# Altium PCB PCB1.PcbDoc
Units mm, origin at the board's own origin, x right, y up, seen from the top; angles counter-clockwise.
Board outline 142.49 x 102.87 mm, 2 copper layers (Top Layer, Bottom Layer); 60 components, 32 nets, 143 pads, 2 vias.
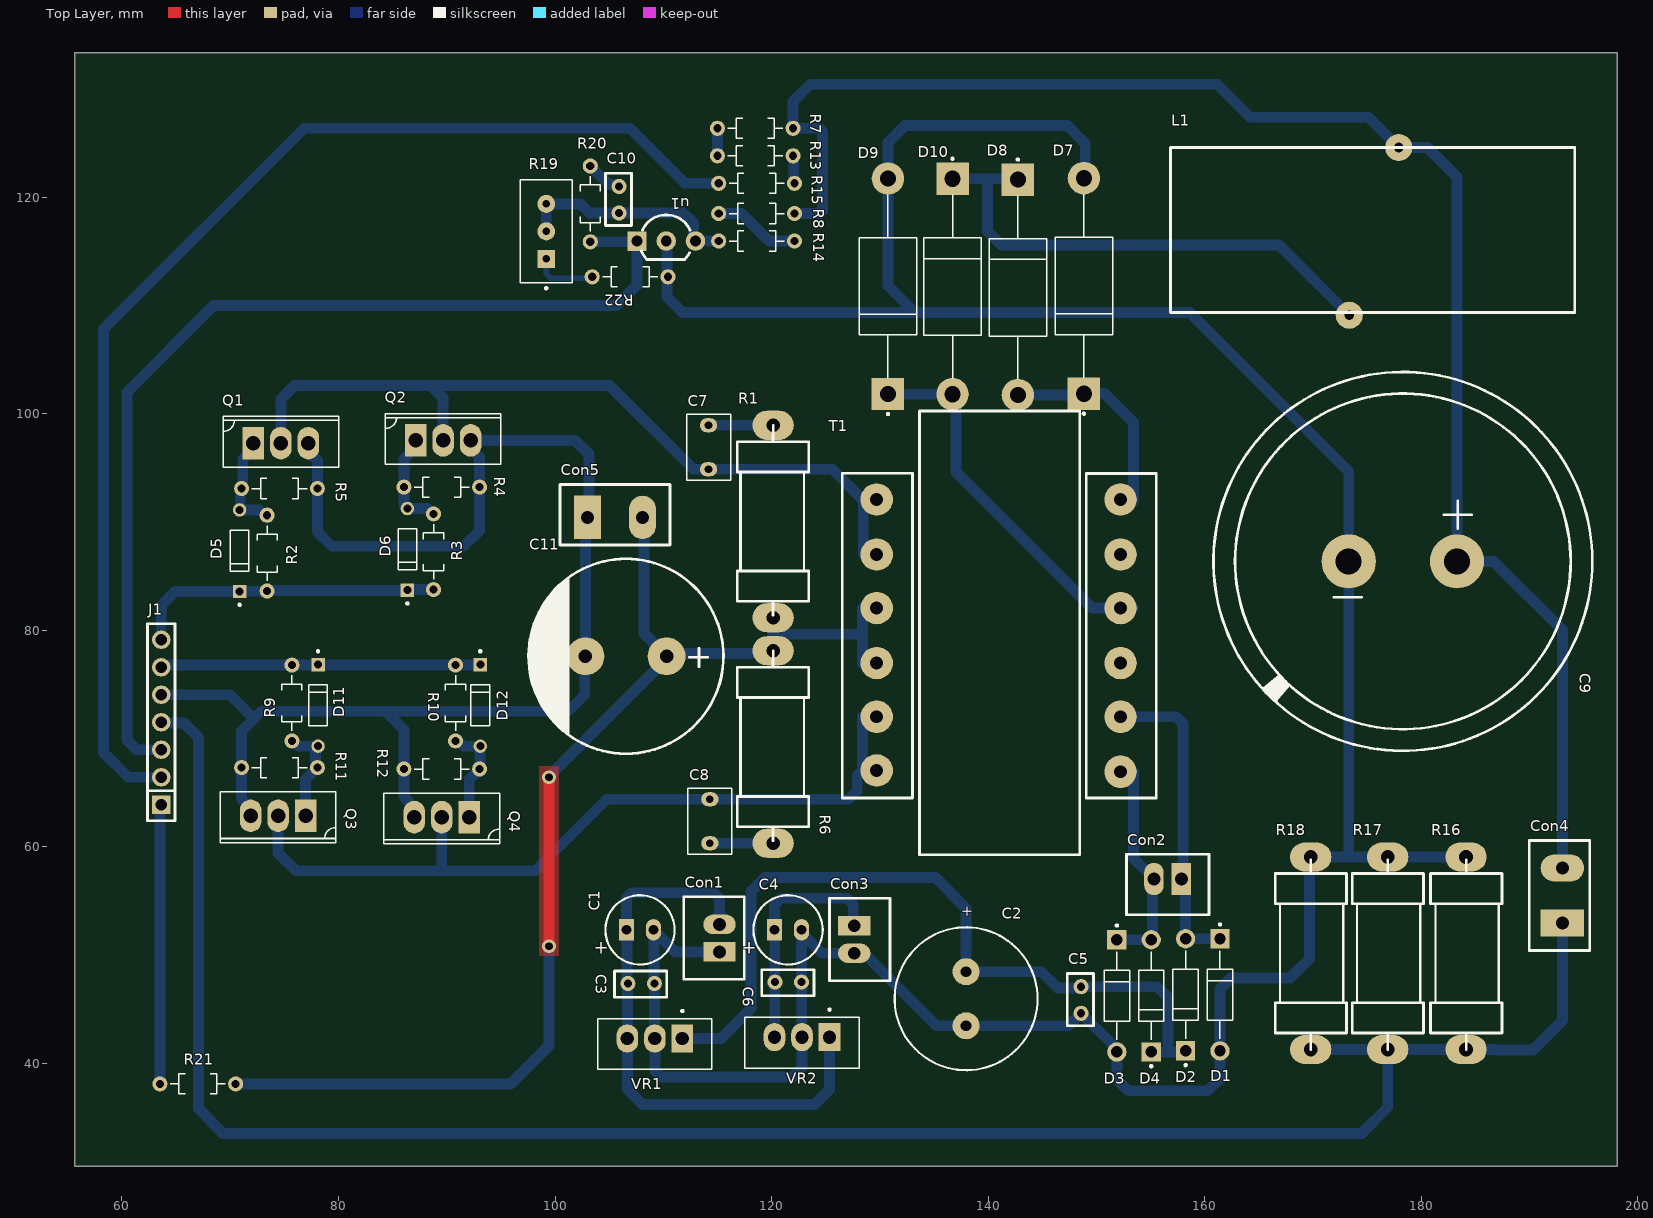
[diagram p0: Top Layer view]
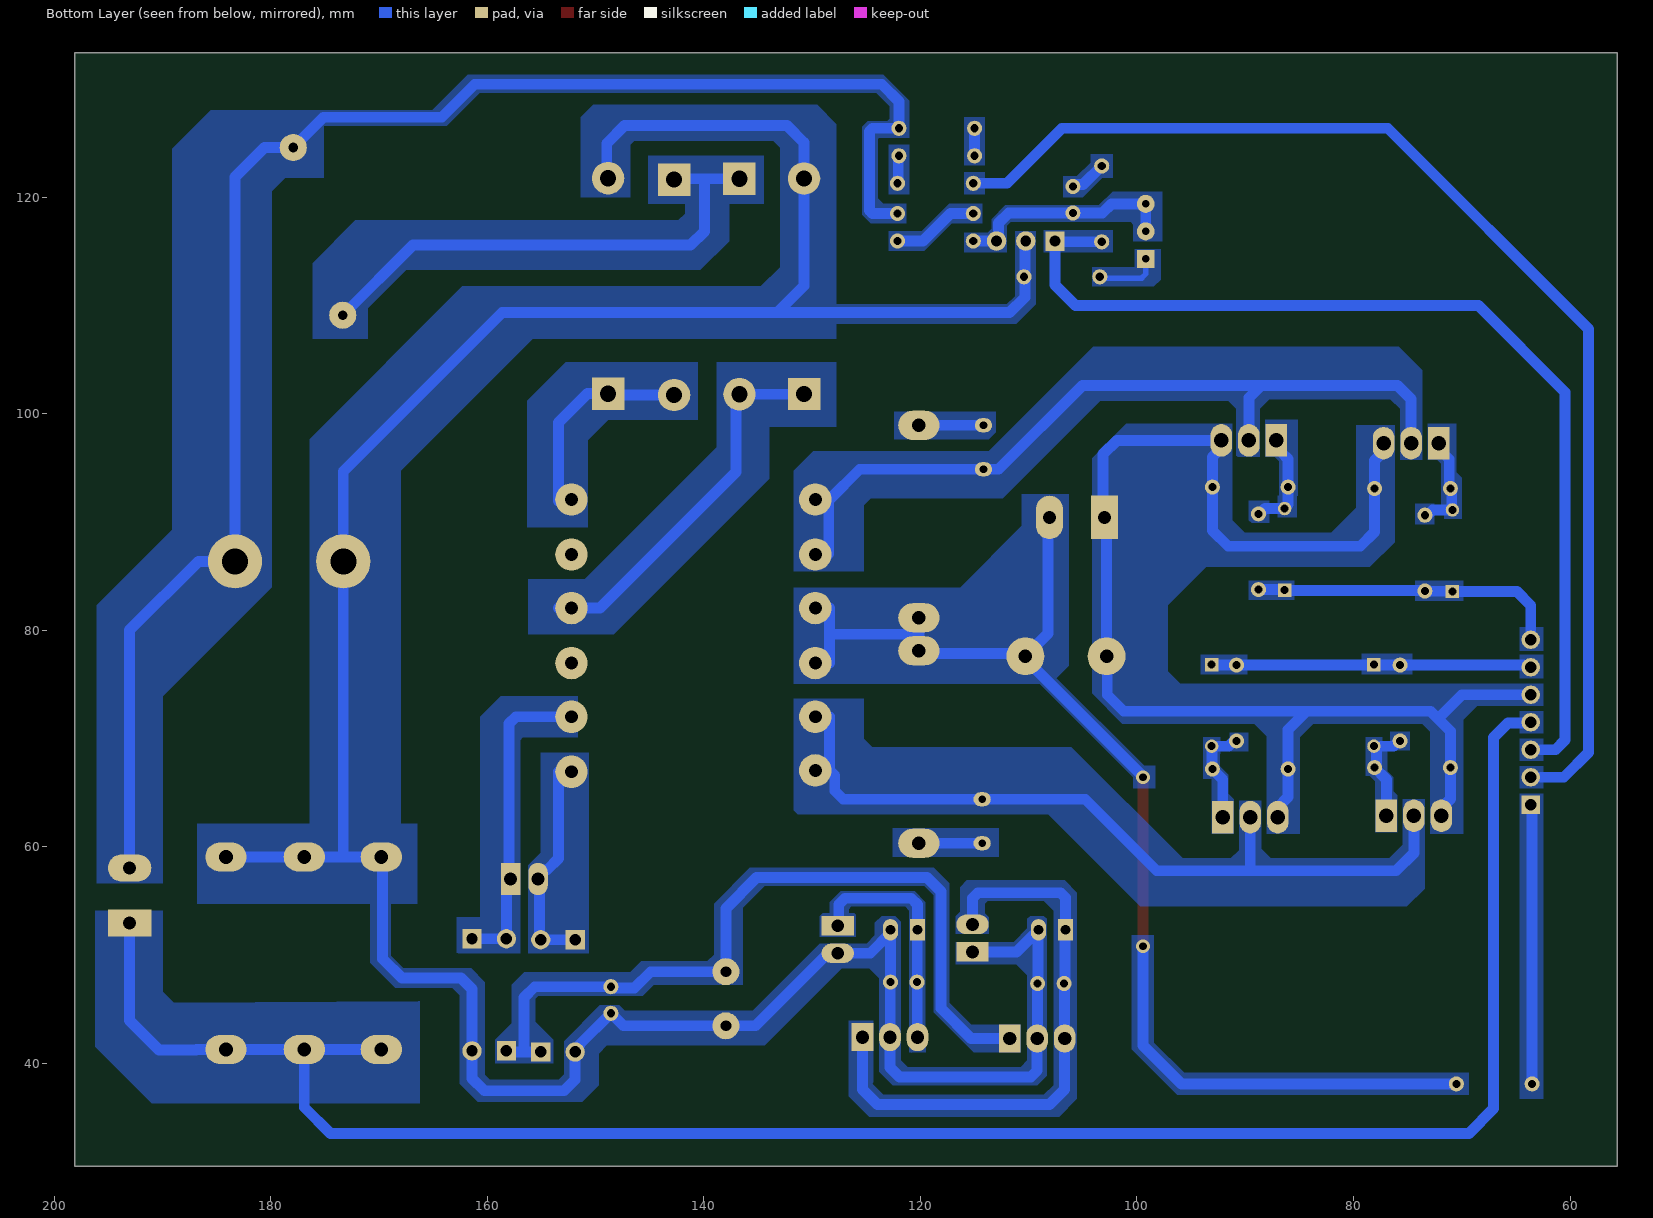
[diagram p1: Bottom Layer view, seen from below]
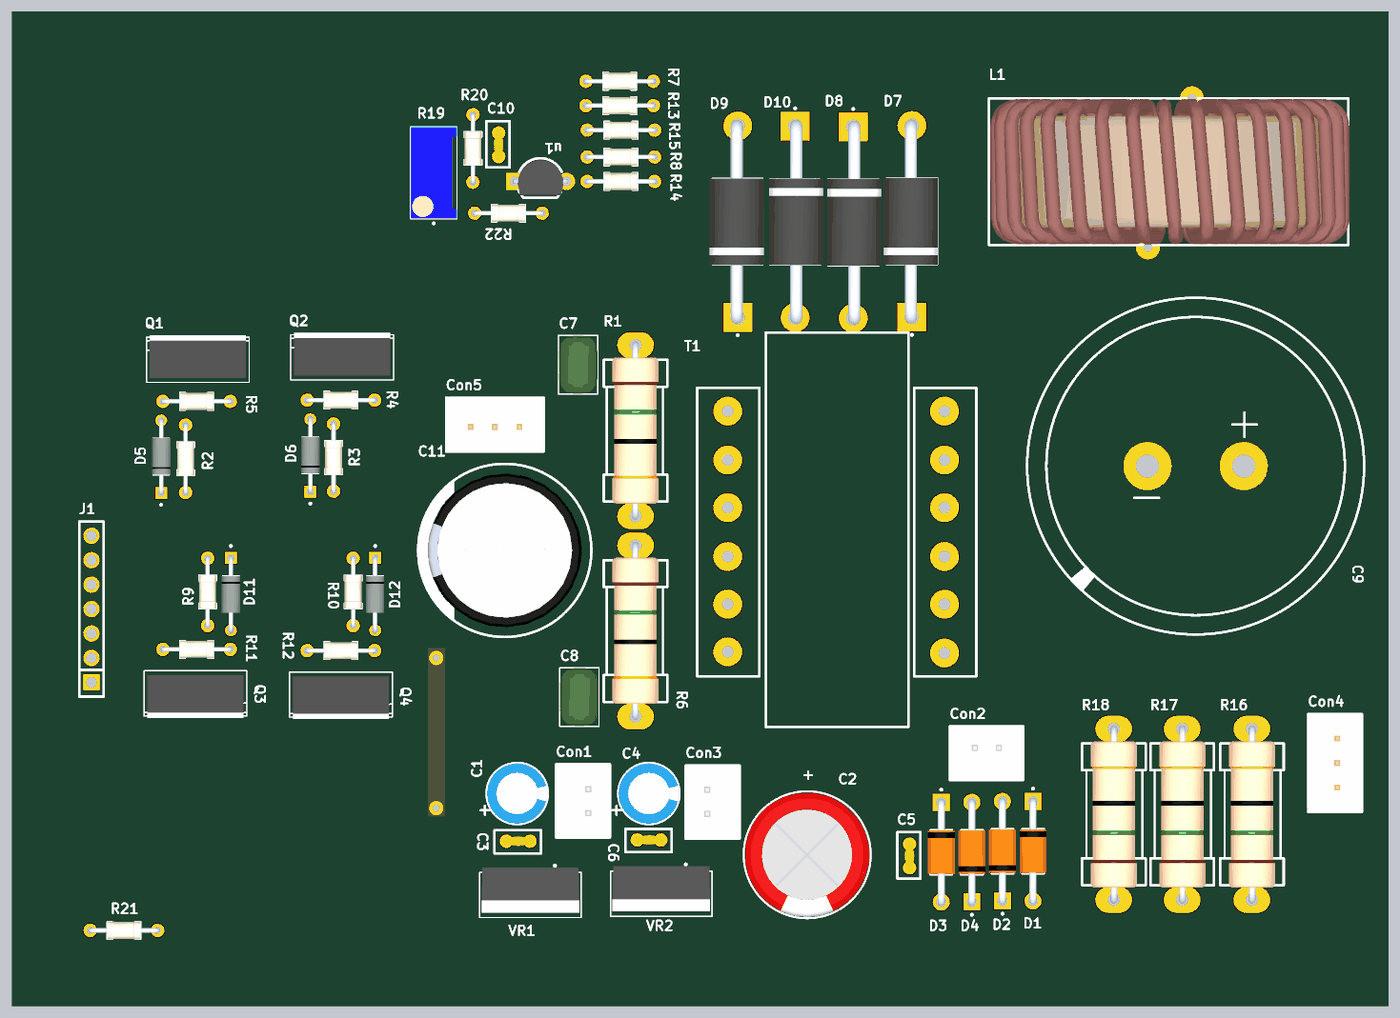
[diagram p2: 3D render of the assembled board from above, using the file's embedded part models]

## Layer stack, top to bottom
Top Solder: solder mask 0.0102, Solder Resist, Dk 3.5
Top Layer: signal copper 0.0356
Dielectric 1: dielectric 0.32, FR-4, Dk 4.8
Bottom Layer: signal copper 0.0356
Bottom Solder: solder mask 0.0102, Solder Resist, Dk 3.5

## Board outline
55.626,30.48 55.626,133.35 198.12,133.35 198.12,30.48

## Design rules (kind name [scope] priority, off if disabled: settings)
Clearance [All] p1: gap=0.254 ignorepadtopadclearanceinfootprint=FALSE except(0: Arc-Hole Track-Hole SMDPad-Hole THPad-Hole Via-Hole Fill-Hole Poly-Hole Region-Hole Text-Hole)
Height [All] p1: minheight=0 maxheight=50.4 prefheight=12.7
PolygonConnect [All] p1: connectstyle=Direct reliefconductorwidth=0.254 reliefentries=4 polygonreliefangle="90 Angle" airgapwidth=0.254
RoutingVias [All] p1: holewidth=0.711 width=1.27 viastyle="Through Hole" minholewidth=0.711 minwidth=1.27 maxholewidth=0.711 maxwidth=1.27
SolderMaskExpansion [All] p1: expansion=0.102 istentingtop=FALSE
Width [All] p1: maxlimit=1 minlimit=0.254 preferedwidth=0.5 minimp=50.000000 maximp=50.000000 favimp=50.000000
29 further rules are at their usual default settings.

## Classes and differential pairs
component class Sheet2: C7 C8 C9 C10 C11 Con4 Con5 D5 D6 D7 D8 D9 D10 D11 D12 J1 L1 Q1 Q2 Q3 Q4 R1 R2 R3 R4 R5 R6 R7 R8 R9 R10 R11 R12 R13 R14 R15 R16 R17 R18 R19 R20 R21 R22 T1 u1
component class Sheet1: C1 C2 C3 C4 C5 C6 Con1 Con2 Con3 D1 D2 D3 D4 VR1 VR2

## Components (designator, comment, footprint, x,y, rotation, side; value= is the part's Value field where it differs from the comment)
C1 "100UF25V" "CAP LS-2.5MM D6.3 H7 - DUPLICATE" 106.593,52.324 r0 top
C2 "470UF25V" CAP_RADIAL_D13.0_P5.0_H20.0 137.922,45.974 r90 top
C3 "1UFCER" CAP-CER-2.54 107.95,47.371 r180 top
C4 "100UF25V" "CAP LS-2.5MM D6.3 H7 - DUPLICATE" 120.269,52.324 r0 top
C5 "100nFCER" CAP-CER-2.54 148.59,45.847 r90 top
C6 "1UFCER" CAP-CER-2.54 121.539,47.498 r180 top
C7 "0.1uF" CAP-P_PILM 114.173,96.901 r270 top
C8 "0.1uF" CAP-P_PILM 114.3,62.357 r270 top
C9 "1000UF400V" CAP-TH_BD35.0-P10.00-D2.3-FD 178.308,86.36 r180 top
C10 "100nFCER" CAP-CER-2.54 105.918,119.761 r90 top
C11 "4700UF 35V" CAP-TH_BD18.0-P7.50-D1.2-FD 106.553,77.597 r180 top
Con1 "2pos" 2POS 115.189,50.292 r90 top
Con2 "2pos" 2POS 157.861,57.023 r180 top
Con3 "2pos" 2POS 127.635,52.705 r270 top
Con4 "2pos-3" "2POS - 3" 193.04,55.499 r90 top
Con5 "2pos" "2POS - 3" 105.537,90.424 r0 top
D1 "FR107" DIOAD1036W78L470D235 161.417,46.328 r270 top
D2 "FR107" DIOAD1036W78L470D235 158.242,46.328 r90 top
D3 "FR107" DIOAD1036W78L470D235 151.892,46.228 r270 top
D4 "FR107" DIOAD1036W78L470D235 155.067,46.228 r90 top
D5 "1N4148" DO-35 70.866,87.249 r90 top
D6 "1N4148" DO-35 86.36,87.376 r90 top
D7 "FR307" DO-27_BD5.3-L8.4-P12.40-D1.3-RD 148.903,111.413 r90 top
D8 "FR307" DO-27_BD5.3-L8.4-P12.40-D1.3-RD 142.689,112.068 r270 top
D9 "FR307" DO-27_BD5.3-L8.4-P12.40-D1.3-RD 130.81,111.379 r90 top
D10 "FR307" DO-27_BD5.3-L8.4-P12.40-D1.3-RD 136.652,112.141 r270 top
D11 "1N4148" DO-35 78.105,73.152 r270 top
D12 "1N4148" DO-35 93.091,73.152 r270 top
J1 "HDR7Pin" "HDR-TH 7P - DUPLICATE" 63.599,71.477 r90 top
L1 "Troidal core  220uH" "TOROIDAL CORE INDUCTOR" 175.641,116.967 r0 top
Q1 "IRF3205" TO-220 74.676,97.282 r0 top
Q2 "IRF3205" TO-220 89.662,97.536 r0 top
Q3 "IRF3205" TO-220 74.422,62.865 r180 top
Q4 "IRF3205" TO-220 89.535,62.738 r180 top
R1 "RES-0.5W-27R" "RES_TH 3W" 120.142,91.059 r90 top
R2 "10R" RES-TH-7MM 73.406,87.122 r90 top
R3 "10R" RES-TH-7MM 88.773,87.249 r90 top
R4 "10K" RES-TH-7MM 89.535,93.218 r0 top
R5 "10K" RES-TH-7MM 74.549,93.091 r0 top
R6 "RES-0.5W-27R" "RES_TH 3W" 120.142,70.231 r90 top
R7 "150K" RES-TH-7MM 118.491,126.365 r0 top
R8 "1M" RES-TH-7MM 118.618,118.491 r0 top
R9 "10R" RES-TH-7MM 75.692,73.279 r270 top
R10 "10R" RES-TH-7MM 90.805,73.279 r270 top
R11 "10K" RES-TH-7MM 74.549,67.31 r180 top
R12 "10K" RES-TH-7MM 89.535,67.183 r180 top
R13 "150K" RES-TH-7MM 118.491,123.825 r180 top
R14 "0.5M" RES-TH-7MM 118.618,115.951 r0 top
R15 "40K" RES-TH-7MM 118.618,121.285 r0 top
R16 "RES-2W-1R" "RES_TH 3W" 184.15,49.149 r270 top
R17 "RES-2W-1R" "RES_TH 3W" 176.911,49.149 r270 top
R18 "RES-2W-1R" "RES_TH 3W" 169.799,49.149 r270 top
R19 "10K" TRIM_3296W-1-250 99.187,116.84 r90 top
R20 "4.7K" RES-TH-7MM 103.251,119.38 r90 top
R21 "0R" RES-TH-7MM 67,38.1 r0 top
R22 "4.7K" RES-TH-7MM 106.934,112.649 r180 top
T1 "current transformer" EE35-FP16 140.97,79.502 r0 top
u1 "TL431" TO-92 110.352,115.902 r0 top
VR1 "LM7812CT" TO254P1054X470X1955-3 109.22,42.291 r180 top
VR2 "LM7805CT" TO254P1054X470X1955-3 122.809,42.418 r180 top

## Footprints (in the part's own frame and the unit in brackets; to place one, negate y for a bottom-side part, rotate by r counter-clockwise, add the part's x,y. Pads: shape width x height; smd on the part's side, far side on the other; paste and mask are expansions set on the pad)
2POS [mm]
  rect 1.8x3 hole 1.2: 1(0,0)
  oval 1.8x3 hole 1.2: 2(2.54,0)
  silkscreen extent -2.54,-2.29 5.08,3.3, body extent -2.47,-2.32 4.96,3.41, height 6.69
"2POS - 3" [mm]
  rect 2.5x4 hole 1.2: 1(-2.54,0)
  oval 2.5x4 hole 1.2: 2(2.54,0)
  silkscreen extent -5.08,-2.54 5.08,3.05, body extent -5.04,-2.54 5.04,3.16, height 7.01
"CAP LS-2.5MM D6.3 H7 - DUPLICATE" [mm]
  rect 1.4x2 hole 0.9: 1(0,0)
  oval 1.4x2 hole 0.9: 2(2.5,0)
  silkscreen extent -1.95,-3.2 4.45,3.2, body extent -1.89,-3.14 4.39,3.14, height 7
CAP-CER-2.54 [mm]
  round 1.397 hole 0.75: 1(-1.225,0) 2(1.225,0)
  silkscreen extent -2.37,-1.14 2.46,1.27, body extent -1.62,-0.5 1.62,0.5, height 4.99
CAP-P_PILM [mm]
  oval 1.3x1.6 hole 0.71: 1(-2.032,0) 2(2.032,0)
  silkscreen extent -3.05,-2.03 3.05,2.03, body extent -3,-2 3,2, height 12.5
CAP-TH_BD18.0-P7.50-D1.2-FD [mm]
  round 3.5 hole 1.25 paste+0 mask+0.051: 1(-3.75,0.001) 2(3.75,0.001)
  silkscreen extent -9,-9 9,9, body extent -8,-8 8,8, height 35
CAP-TH_BD35.0-P10.00-D2.3-FD [mm]
  round 5 hole 2.4 paste+0 mask+0.051: 1(-5,0) 2(5,0)
  silkscreen extent -17.5,-17.5 17.5,17.5, body extent -15,-15 15,15, height 34.94
CAP_RADIAL_D13.0_P5.0_H20.0 [mm]
  round 2.5 hole 1: 1(2.487,-0.044) 2(-2.513,-0.044)
  silkscreen extent -6.61,-6.64 6.59,6.55, body extent -6.49,-6.52 6.5,6.47, height 19.89
DIOAD1036W78L470D235 [mm]
  rect 1.778x1.778 hole 1.06: 1(-5.18,0)
  round 1.778 hole 1.06: 2(5.18,0)
  silkscreen extent -6.6,-1.17 4.07,1.17, body extent -5.55,-1.4 5.55,1.4, height 2.8
DO-27_BD5.3-L8.4-P12.40-D1.3-RD [mm]
  round 3 hole 1.5 mask+0.102: A(10.341,0.059)
  rect 3x3 hole 1.5 mask+0.102: C(-9.559,0.059)
  silkscreen extent -11.51,-2.59 8.86,2.71, body extent -10.19,-2.62 10.96,2.96, height 5.6
DO-35 [mm]
  rect 1.238x1.238 hole 0.73 mask+0.102: 1(-3.674,0.005)
  round 1.238 hole 0.73 mask+0.102: 2(3.863,0.005)
  silkscreen extent -5.01,-0.86 2,0.86, body extent -3.88,-0.96 4.12,0.95, height 1.9
EE35-FP16 [mm]
  round 3 hole 1.2 paste+0.102 mask+0.102: 1(-11.26,7.493) 1(-11.26,12.573) 2(-11.26,-2.54) 2(-11.26,2.54) 3(-11.26,-12.446) 3(-11.26,-7.493) 4(11.26,-12.573) 5(11.26,-7.493) 6(11.26,2.54) 7(11.26,12.573) ""(11.26,-2.54) ""(11.26,7.493)
  silkscreen extent -14.43,-20.25 14.57,20.75
"HDR-TH 7P - DUPLICATE" [mm]
  rect 1.7x1.7 hole 1.1 paste+0 mask+0.051: 1(-7.596,-0.028)
  round 1.7 hole 1.1 paste+0 mask+0.051: 2(-5.056,-0.028) 3(-2.516,-0.028) 4(0.024,-0.028) 5(2.564,-0.028) 6(5.104,-0.028) 7(7.644,-0.028)
  silkscreen extent -9.08,-1.3 9.12,1.24
RES-TH-7MM [mm]
  round 1.397 hole 0.75: 1(-3.5,0) 2(3.5,0)
  silkscreen extent -2.55,-0.92 2.55,0.92, body extent -3.72,-0.92 3.72,0.92, height 1.84
"RES_TH 3W" [mm] "Res_TH 3W"
  oval 2.7x3.81 hole 1.27: 1(-9.906,0) 2(7.874,0)
  silkscreen extent -9.66,-3.29 7.87,3.31, body extent -10.24,-2.36 8.25,2.42, height 5.72
TO254P1054X470X1955-3 [mm]
  rect 2x2.6 hole 1.24: 1(-2.54,0)
  oval 2x2.6 hole 1.24: 2(0,0) 3(2.54,0)
  silkscreen extent -5.27,-2.64 5.27,2.86, body extent -5.08,-2.35 5.08,2.35, height 15.49
TO-92 [mm]
  rect 1.8x1.8 hole 1 paste+0 mask+0.051: 1(-2.783,0.049)
  round 1.8 hole 1 paste+0 mask+0.051: 2(-0.083,0.049) 3(2.617,0.049)
  silkscreen extent -2.38,-1.65 2.12,2.46, body extent -2.91,-1.37 2.75,2.25, height 8.77
TO-220 [mm] "TO-220"
  rect 2x3 hole 1.32: 1(-2.54,0)
  oval 2x3 hole 1.32: 2(0,0) 3(2.54,0)
  silkscreen extent -5.34,-2.22 5.34,2.47, body extent -4.98,-1.76 4.98,2.69, height 19.68
"TOROIDAL CORE INDUCTOR" [mil]
  round 98.42 hole 36 paste+0 mask+2: 1(90,300) 2(-90,-310)
  silkscreen extent -740,-300 730,300, body extent -735,-297 735,297, height 1522
TRIM_3296W-1-250 [mil]
  rect 65x65 hole 27.95: 1(-100,0)
  round 65 hole 27.95: 2(0,0) 3(100,0)
  silkscreen extent -211,-95 188,95, body extent -188,-95 188,95, height 455

## Part data
C1 C4: "CAP TH AL: 100U 25V", LCSC Part #=C43351, Unit Price=0.0057
C2: "CAP TH AL: 470U 25V", LCSC Part #=C43351, Unit Price=0.0057
C3 C6: "CAP: CER 1UF 50V", LCSC Part #=C1848, Unit Price=0.0104
C5: "CAP: CER 100nF 16V", LCSC Part #=C1848, Unit Price=0.0104
C7 C8: library part 0.1uF_film, "Cap Ceramic 0.1uF 100V X7R 10% Radial 2.54mm 125Â°C T/R", Package=None, Check_prices=https://www.snapeda.com/parts/SR201C104KARTR1/Kyocera/view-part/?ref=eda, MF="KYOCERA AVX", MP=SR201C104KARTR1, SnapEDA_Link=https://www.snapeda.com/parts/SR201C104KARTR1/Kyocera/view-part/?ref=snap
C9: "CAP TH AL: 1000U 400V", LCSC Part #=C43351, Unit Price=0.0057
C10: "CAP: CER 100nF 50V", LCSC Part #=C1848, Unit Price=0.0104
C11: "CAP TH AL: 4700UF 35V", LCSC Part #=C43351, Unit Price=0.0057
Con1 Con2 Con3 Con4 Con5: "P2.54mm"
D1 D2 D3 D4: "DIODE: GEN 1A 1.0V@1A 1kV DO-41 TH", LCSC Part #=C36138, Unit Price=0.0313
D5 D6 D11 D12: "Rectifier Diode Small Signal Switching 100V 0.3A 4ns 2-Pin DO-35 T/R", LCSC Part #=C36138, Unit Price=0.0313
D7 D8 D9 D10: "DIODE: 500ns, 3A, 1000V, Fast Recovery RectifierDO-201AD TH", LCSC Part #=C36138, Unit Price=0.0313
J1: "HEADER: 1*7P Male"
L1: library part Inductor, "Troidal core  inductor: 220uH"
Q1 Q2 Q3 Q4: "MOSFET: N-CH 55V 110A TO-220", LCSC Part #=C274639, Unit Price=0.2595
R1 R6: "RES: 27 OHM 1% 0.5W TH"
R2 R3 R9 R10: "RES TH: 10R"
R4 R5 R11 R12: "RES TH: 10K"
R7 R13: "RES TH: 150K"
R8: "RES TH: 1M"
R14: "RES TH: 0.5M"
R15: "RES TH: 40K"
R16 R17 R18: "RES: 1 OHM 1% 2W TH"
R19: library part "10K POT", "RES TH: 10K POT"
R20 R22: "RES TH: 4.7K"
R21: "RES TH: JUMPER"
T1: library part "EE35 transformer", "ferrite core transformer EE35"
u1: "Adjustable precision shunt regulator"
VR1: "1.5-A, 12-V, linear voltage regulator", Package="TO-220-3 Texas Instruments", Check_prices=https://www.snapeda.com/parts/LM7812CT/NOPB/Texas+Instruments/view-part/?ref=eda, MF="Texas Instruments", MP=LM7812CT/NOPB, SnapEDA_Link=https://www.snapeda.com/parts/LM7812CT/NOPB/Texas+Instruments/view-part/?ref=snap
VR2: "1.5-A,  5-V, linear voltage regulator", Package="TO-220-3 Texas Instruments", Check_prices=https://www.snapeda.com/parts/LM7812CT/NOPB/Texas+Instruments/view-part/?ref=eda, MF="Texas Instruments", MP=LM7812CT/NOPB, SnapEDA_Link=https://www.snapeda.com/parts/LM7812CT/NOPB/Texas+Instruments/view-part/?ref=snap

## Via types
v1: diameter 1.27, hole 0.711, Top Layer to Bottom Layer, 2 vias

## Nets (pads, with @x,y where several pads share a name; then routed paths per layer and width w, separated by ;. In a path a pad name is that pad's centre, name@x,y a point inside that pad or via, vN(x,y) a via of type N, cw(c..) or ccw(c..) an arc to the next point about the centre after c; other vN are vias at no path point)
400V: C9.1 Con4.2 L1.1 R7.2 R8.2 | length 150.7
  Bottom Layer w1: R8.2 124.421,118.491 124.714,118.784 124.714,126.072 124.421,126.365 R7.2 121.991,128.849 123.571,130.429 161.163,130.429 164.211,127.381 175.133,127.381 L1.1 180.594,124.587 183.308,121.873 C9.1 186.69,86.36 193.04,80.01 Con4.2
+5: C4.1 C6.2 Con3.1 VR2.3 | length 22
  Bottom Layer w1: VR2.3 120.291,42.44 120.291,47.476 C6.2 120.291,47.52 120.291,52.302 C4.1 120.269,54.659 120.855,55.245 126.962,55.245 127.548,54.659 127.548,53.105 127.635,53.018 Con3.1
+12: C1.1 C3.2 Con1.2 VR1.3 VR2.1 | length 53.8
  Bottom Layer w1: Con1.2 115.189,55.245 114.681,55.753 107.061,55.753 106.593,55.285 C1.1 106.659,52.258 106.659,47.437 C3.2 106.702,47.349 106.702,42.313 VR1.3 106.68,37.592 108.077,36.195 123.952,36.195 125.349,37.592 VR2.1
+18VAC: Con2.1 D1.1 D2.2 T1.5 | length 28.1
  Bottom Layer w1: T1.5@153.416,72.009 157.353,72.009 157.988,71.374 157.988,57.15 Con2.1 158.242,56.642 D2.2 D1.1
-18VAC: Con2.2 D3.1 D4.2 T1.4 | length 19.7
  Bottom Layer w1: D3.1 D4.2 155.194,51.535 155.194,56.896 Con2.2 155.321,57.271 154.72,57.872 154.472,57.872 153.416,58.928 T1.4@153.416,66.929
D1: C7.2 Q1.2 Q2.2 T1.1 | length 73.4
  Bottom Layer w1: Q1.2 74.676,101.346 75.946,102.616 88.519,102.616 ; Q2.2 89.662,101.473 88.519,102.616 ; T1.1@128.524,86.995 128.46,87.058 128.46,92.011 128.397,92.075 125.603,94.869 112.776,94.869 105.029,102.616 88.519,102.616
D2: C8.1 Q3.2 Q4.2 T1.3 | length 72.7
  Bottom Layer w1: Q3.2 74.422,59.436 76.073,57.785 89.535,57.785 ; Q4.2 89.535,57.785 ; T1.3@128.397,72.009 128.397,67.056 127.919,66.578 127.919,65.181 127.127,64.389 C8.1 104.775,64.389 98.171,57.785 89.535,57.785
GND: C11.2 Con5.1 J1.5 Q1.3 Q2.3 Q3.3 Q4.3 R4.2 R5.2 R11.2 R12.2 | length 128.8
  Bottom Layer w1: J1.5 69.977,74.041 72.2,71.819 ; Q3.3 71.882,63.575 71.049,64.408 R11.2 71.049,70.668 72.2,71.819 ; Q1.3 77.407,97.091 77.407,96.31 78.049,95.668 78.049,89.083 79.375,87.757 91.567,87.757 93.035,89.225 R4.2 93.035,95.993 92.202,96.826 Q2.3 101.854,97.536 103.124,96.266 103.124,91.821 102.803,91.5 C11.2 102.743,77.536 102.743,74.041 101.219,72.517 84.328,72.517 ; Q4.3 86.995,63.644 86.035,64.604 R12.2 86.035,70.81 84.328,72.517 ; 72.2,71.819 72.898,72.517 84.328,72.517
GND1: C1.2 C2.2 C3.1 C4.2 C5.1 C6.1 C9.2 Con1.1 Con3.2 D1.2 D3.2 D7.A D9.A R16.1 R17.1 R18.1 R22.1 u1.2 VR1.2 VR2.2 | length 286.4
  Bottom Layer w1: C1.2 109.093,52.268 C1.2@109.134,52.227 ; u1.2 110.351,115.868 110.351,110.756 111.76,109.347 133.223,109.347 ; Con1.1 111.125,50.292 109.565,51.852 109.509,51.852 C1.2@109.134,52.227 ; D7.A 148.971,121.881 148.971,124.968 147.32,126.619 132.334,126.619 130.751,125.036 D9.A 130.751,111.819 133.223,109.347 ; R16.1 R17.1 173.308,59.055 ; C1.2@109.134,52.227 109.134,47.412 C3.1 109.198,47.348 109.198,42.313 VR1.2 109.22,39.321 109.806,38.735 121.92,38.735 122.809,39.624 VR2.2 122.787,42.44 122.787,47.475 C6.1 122.766,47.5 122.766,52.322 C4.2 122.769,52.024 124.628,50.165 128.524,50.165 135.228,43.461 C2.2 147.429,43.461 C5.1 151.503,41.709 151.503,41.648 151.892,41.259 151.892,38.481 152.908,37.465 160.274,37.465 161.417,38.608 D1.2 161.417,46.863 162.433,47.879 167.894,47.879 169.672,49.657 169.672,58.928 R18.1 173.308,59.055 ; 133.223,109.347 158.623,109.347 173.308,94.662 C9.2 173.308,59.055
I_SENSE: Con4.1 J1.4 R16.2 R17.2 R18.2 | length 188.8
  Bottom Layer w1: J1.4 63.687,71.441 65.719,71.441 67.056,70.104 67.056,35.814 69.342,33.528 174.498,33.528 176.911,35.941 R17.2 ; R18.2 R17.2 ; Con4.1 193.04,43.942 190.326,41.228 186.91,41.228 186.863,41.275 R16.2 R17.2
NetC2_1: C2.1 C5.2 D2.1 D4.1 VR1.1 | length 73.6
  Bottom Layer w1: VR1.1 115.316,42.291 118.11,45.085 118.11,55.88 119.38,57.15 135.128,57.15 137.966,54.312 C2.1 144.915,48.461 146.431,46.945 C5.2@148.59,46.945 ; C5.2 155.62,47.072 156.605,46.087 156.605,41.048 ; D4.1 156.605,41.048 ; D2.1 158.142,41.048 156.605,41.048
NetC7_1: C7.1 R1.2 | length 6
  Bottom Layer w1: C7.1 R1.2
NetC8_2: C8.2 R6.1 | length 5.8
  Bottom Layer w1: C8.2 R6.1
NetC10_1: C10.1 R14.1 R19.2 R19.3 u1.3 | length 20.7
  Bottom Layer w1: R19.2 R19.3 102.362,119.38 103.206,118.536 C10.1 111.842,118.536 112.777,117.601 112.777,116.143 u1.3 R14.1
NetC10_2: C10.2 R20.2 | length 3.5
  Bottom Layer w1: R20.2 104.973,121.158 105.746,121.158 C10.2
NetD5_2: D5.2 Q1.1 R2.2 R5.1 | length 9.4
  Bottom Layer w1: Q1.1 72.136,96.782 71.15,95.796 71.15,93.263 70.92,93.033 70.92,91.17 D5.2 72.673,91.112 73.163,90.622 R2.2
NetD6_2: D6.2 Q2.1 R3.2 R4.1 | length 9.5
  Bottom Layer w1: Q2.1 86.622,97.036 86.622,96.401 86.035,95.814 86.035,91.624 86.355,91.303 D6.2 88.176,91.239 88.666,90.749 R3.2
NetD7_C: D7.C D8.A T1.7 | length 19.1
  Bottom Layer w1: D8.A 148.717,101.727 D7.C 150.749,101.854 153.416,99.187 T1.7@153.416,91.948
NetD8_C: D8.C D10.C L1.2 | length 47.6
  Bottom Layer w1: D10.C 139.693,121.7 ; D8.C 142.675,121.7 139.693,121.7 ; L1.2 166.878,115.57 141.224,115.57 139.954,116.84 139.954,121.439 139.693,121.7
NetD9_C: D9.C D10.A T1.6 | length 34.9
  Bottom Layer w1: D9.C 130.772,101.8 D10.A 137.033,101.478 137.033,94.615 149.606,82.042 T1.6@153.416,82.042
NetD11_2: D11.2 Q3.1 R9.2 R11.1 | length 9.7
  Bottom Layer w1: R9.2 75.799,69.779 76.289,69.289 D11.2 78.11,69.225 77.877,68.992 77.877,67.763 77.973,67.667 77.973,67.386 R11.1 ; Q3.1 76.962,66.223 R11.1@78.079,67.34
NetD12_2: D12.2 Q4.1 R10.2 R12.1 | length 9.4
  Bottom Layer w1: R10.2 91.048,69.779 91.538,69.289 D12.2 93.065,69.259 R12.1@93.065,67.213 ; Q4.1 92.075,66.223 R12.1
NetJ1_1: J1.1 R21.1 | length 25.8
  Bottom Layer w1: R21.1 63.5,63.754 J1.1
NetR7_1: R7.1 R13.2 | length 2.5
  Bottom Layer w1: R13.2 R7.1
NetR8_1: R8.1 R14.2 | length 8.1
  Bottom Layer w1: R8.1 117.221,118.491 119.761,115.951 R14.2
NetR13_1: R13.1 R15.2 | length 2.6
  Bottom Layer w1: R13.1 122.055,123.761 122.055,121.349 R15.2
NetR19_1: R19.1 R22.2 | length 6.3
  Bottom Layer w0.5: R19.1 99.187,112.903 99.568,112.522 103.307,112.522 R22.2
  Bottom Layer w1: R19.1 R19.1@99.512,113.975
opto_A: J1.2 R15.1 | length 112
  Bottom Layer w1: J1.2 60.579,66.421 58.293,68.707 58.293,107.823 76.835,126.365 106.934,126.365 112.014,121.285 R15.1
opto_C: J1.3 R20.1 u1.1 | length 95.3
  Bottom Layer w1: J1.3 61.341,68.961 60.452,69.85 60.452,101.981 68.453,109.982 105.664,109.982 107.569,111.887 u1.1 107.498,115.88 R20.1
PULSE_A_G: D5.1 D6.1 J1.7 R2.1 R3.1 | length 28.9
  Bottom Layer w1: J1.7 63.627,82.296 64.906,83.575 D5.1 70.885,83.598 73.382,83.598 R2.1 73.446,83.662 86.315,83.662 86.402,83.749 R3.1
PULSE_B_G: D11.1 D12.1 J1.6 R9.1 R10.1 | length 29.6
  Bottom Layer w1: J1.6 63.761,76.715 64.256,76.715 64.32,76.779 R9.1 75.716,76.803 78.086,76.803 D11.1 78.133,76.803 90.781,76.803 R10.1 90.829,76.803 93.072,76.803 D12.1
VBATT: C11.1 Con5.2 R1.1 R6.2 R21.2 T1.2 | length 112.8
  Top Layer w1: v1(99.441,50.8) v1(99.441,66.421)
  Bottom Layer w0.5: C11.1@110.303,77.029 C11.1
  Bottom Layer w1: R21.2@70.317,38.1 95.885,38.1 99.441,41.656 v1(99.441,50.8) ; v1(99.441,66.421) 99.441,66.494 109.976,77.029 C11.1@110.303,77.029 ; Con5.2@108.204,91.821 108.204,79.695 C11.1 110.557,77.851 119.888,77.851 R6.2 120.142,79.629 ; R1.1 120.142,79.629 ; T1.2@128.397,76.962 128.397,79.756 ; T1.2@128.397,82.042 128.397,79.756 ; 120.142,79.629 128.27,79.629 128.397,79.756
pads on no net: T1.

## Polygon pours and split planes (outlines as drawn)
NetD12_2 on Bottom Layer "NETD12_2_L02_P066" (solid, pour order 66): 91.059,61.214 91.059,64.389 91.567,64.897 91.567,66.665 92.339,67.437 93.853,67.437 93.853,66.294 93.218,66.294 93.091,66.294 93.091,65.659 93.091,61.214
NetD11_2 on Bottom Layer "NETD11_2_L02_P065" (solid, pour order 65): 75.946,61.341 75.946,64.77 76.327,65.151 76.327,66.421 76.962,67.056 78.867,67.056 78.867,66.548 78.486,66.548 77.978,66.04 77.978,61.341
NetD6_2 on Bottom Layer "NETD6_2_L02_P064" (solid, pour order 64): 88.138,99.441 88.138,96.012 87.249,96.012 86.868,95.631 86.868,94.107 85.155,94.107 85.155,99.441
NetD5_2 on Bottom Layer "NETD5_2_L02_P063" (solid, pour order 63): 73.152,99.06 73.152,95.758 72.263,95.758 71.882,95.377 71.882,93.726 69.977,93.726 69.977,94.107 70.485,94.615 70.485,99.06
VBATT on Bottom Layer "VBATT_L02_P000" (solid, pour order 0): 106.299,92.583 110.617,92.583 110.617,89.662 116.332,83.947 131.699,83.947 131.699,75.057 107.95,75.057 106.299,76.708
400V on Bottom Layer "400V_L02_P002" (solid, pour order 2): 189.992,56.642 196.088,56.642 196.088,82.296 189.103,89.281 189.103,124.46 185.674,127.889 175.133,127.889 175.133,121.793 178.689,121.793 179.959,120.523 179.921,120.485 179.921,83.985 189.992,73.914
NetD8_C on Bottom Layer "NETD8_C_L02_P003" (solid, pour order 3): 134.493,123.825 145.161,123.825 145.161,119.38 141.732,119.38 141.732,118.491 142.367,117.856 172.212,117.856 176.149,113.919 176.149,106.934 171.069,106.934 171.069,109.728 167.513,113.284 140.335,113.284 137.668,115.951 137.668,119.38 134.493,119.38 134.493,123.698
GND1 on Bottom Layer "GND1_L02_P004" (solid, pour order 4): 146.812,120.015 151.384,120.015 151.384,127.381 150.241,128.524 129.54,128.524 127.762,126.746 127.762,106.934 155.829,106.934 168.021,94.742 168.021,62.103 166.497,62.103 166.497,54.737 186.817,54.737 186.817,62.103 176.403,62.103 176.403,97.663 162.306,111.76 134.747,111.76 132.969,113.538 132.969,124.587 133.604,125.222 146.431,125.222 146.812,124.841 146.812,123.825
400V on Bottom Layer "400V_L02_P005" (solid, pour order 5): 121.285,119.38 123.444,119.38 123.952,119.888 123.952,125.349 123.825,125.476 121.031,125.476 121.031,128.905 123.444,131.318 161.798,131.318 165.106,128.01 185.553,128.01 185.674,127.889 185.674,126.619 163.741,126.619 160.693,129.667 124.079,129.667 122.809,128.397 122.809,127.254 123.063,127 124.841,127 125.349,126.492 125.349,118.364 124.596,117.611 121.285,117.611
NetR13_1 on Bottom Layer "NETR13_1_L02_P006" (solid, pour order 6): 121.031,124.841 122.936,124.841 122.936,120.269 121.031,120.269
NetR7_1 on Bottom Layer "NETR7_1_L02_P007" (solid, pour order 7): 114.046,127.381 115.951,127.381 115.951,122.936 114.046,122.936
NetR8_1 on Bottom Layer "NETR8_1_L02_P008" (solid, pour order 8): 114.3,119.38 117.348,119.38 119.888,116.84 122.936,116.84 122.936,115.062 119.634,115.062 117.085,117.611 114.3,117.611
NetC10_2 on Bottom Layer "NETC10_2_L02_P010" (solid, pour order 10): 102.235,123.952 104.267,123.952 104.267,123.19 105.537,121.92 106.807,121.92 106.807,120.015 105.001,120.015 103.223,121.793 102.235,121.793
NetC10_1 on Bottom Layer "NETC10_1_L02_P011" (solid, pour order 11): 100.33,115.951 100.33,117.475 100.584,117.729 111.633,117.729 112.014,117.348 112.014,114.935 115.951,114.935 115.951,116.713 113.792,116.713 113.411,117.094 113.411,117.983 112.141,119.253 103.505,119.253 102.235,120.523 97.663,120.523 97.663,115.951
GND1 on Bottom Layer "GND1_L02_P014" (solid, pour order 14): 109.347,116.84 111.252,116.84 111.252,110.871 112.014,110.109 128.778,110.109 128.778,108.331 111.125,108.331 109.347,110.109
NetR19_1 on Bottom Layer "NETR19_1_L02_P015" (solid, pour order 15): 97.79,115.189 100.203,115.189 100.203,113.538 104.14,113.538 104.14,111.76 98.425,111.76 97.79,112.395
opto_C on Bottom Layer "OPTO_C_L02_P017" (solid, pour order 17): 108.585,116.967 108.585,114.935 102.235,114.935 102.235,116.967
-18VAC on Bottom Layer "-18VAC_L02_P018" (solid, pour order 18): 150.622,68.707 155.067,68.707 155.067,59.436 156.21,58.293 156.21,50.165 150.622,50.165 150.622,53.848
+18VAC on Bottom Layer "+18VAC_L02_P019" (solid, pour order 19): 151.638,73.914 158.75,73.914 160.655,72.009 160.655,53.467 162.814,53.467 162.814,50.038 162.687,50.165 156.972,50.165 156.972,69.85 156.718,70.104 151.638,70.104
GND on Bottom Layer "GND_L02_P020" (solid, pour order 20): 62.484,75.057 62.484,73.025 68.58,73.025 69.85,71.755 69.85,61.214 72.898,61.214 72.898,70.612 73.66,71.374 83.693,71.374 84.963,70.104 84.963,61.214 88.011,61.214 88.011,70.231 89.154,71.374 101.346,71.374 104.14,74.168 104.14,95.885 100.965,99.06 91.186,99.06 91.186,90.17 90.043,89.027 82.042,89.027 79.756,91.313 79.756,98.933 76.2,98.933 76.2,88.138 78.486,85.852 93.599,85.852 97.155,82.296 97.155,76.2 96.012,75.057
D2 on Bottom Layer "D2_L02_P021" (solid, pour order 21): 73.406,64.389 75.438,64.389 75.438,60.198 76.708,58.928 87.63,58.928 88.519,59.817 88.519,64.262 90.551,64.262 90.551,59.69 91.313,58.928 95.758,58.928 106.045,69.215 124.46,69.215 125.222,69.977 125.222,73.66 131.699,73.66 131.699,63.373 131.318,62.992 108.204,62.992 99.695,54.483 75.057,54.483 73.406,56.134
NetC8_2 on Bottom Layer "NETC8_2_L02_P022" (solid, pour order 22): 122.555,61.722 122.555,59.055 112.776,59.055 112.776,61.722
D1 on Bottom Layer "D1_L02_P023" (solid, pour order 23): 73.66,95.758 75.692,95.758 75.692,100.457 76.581,101.346 87.757,101.346 88.646,100.457 88.646,96.012 90.678,96.012 90.805,96.139 90.805,100.457 91.567,101.219 103.378,101.219 112.395,92.202 124.587,92.202 125.222,91.567 125.222,85.471 131.699,85.471 131.699,94.742 129.921,96.52 113.665,96.52 104.013,106.172 75.819,106.172 73.66,104.013
NetC7_1 on Bottom Layer "NETC7_1_L02_P024" (solid, pour order 24): 122.428,100.203 122.428,97.663 113.665,97.663 113.03,98.298 113.03,100.203 118.745,100.203
NetD9_C on Bottom Layer "NETD9_C_L02_P025" (solid, pour order 25): 127.762,104.775 138.811,104.775 138.811,96.901 151.003,84.709 156.21,84.709 156.21,79.629 148.336,79.629 133.985,93.98 133.985,98.806 127.762,98.806
NetD7_C on Bottom Layer "NETD7_C_L02_P026" (solid, pour order 26): 140.589,104.775 152.781,104.775 156.337,101.219 156.337,89.535 150.749,89.535 150.749,97.536 148.844,99.441 140.589,99.441
opto_A on Bottom Layer "OPTO_A_L02_P027" (solid, pour order 27): 114.046,122.301 114.046,120.269 115.951,120.269 115.951,122.301
NetJ1_1 on Bottom Layer "NETJ1_1_L02_P028" (solid, pour order 28): 64.643,64.897 64.643,36.703 62.484,36.703 62.484,64.897 62.611,64.897 62.484,64.897 62.611,64.897
opto_A on Bottom Layer "OPTO_A_L02_P029" (solid, pour order 29): 64.643,67.437 64.643,65.405 62.484,65.405 62.484,67.437
opto_C on Bottom Layer "OPTO_C_L02_P030" (solid, pour order 30): 64.643,67.945 62.484,67.945 62.484,69.977 64.643,69.977
I_SENSE on Bottom Layer "I_SENSE_L02_P031" (solid, pour order 31): 62.484,70.485 64.643,70.485 64.643,72.517 62.484,72.517
PULSE_B_G on Bottom Layer "PULSE_B_G_L02_P032" (solid, pour order 32): 64.643,77.724 64.643,77.597 64.643,75.565 62.484,75.565 62.484,77.724
PULSE_A_G on Bottom Layer "PULSE_A_G_L02_P033" (solid, pour order 33): 62.484,78.105 64.643,78.105 64.643,80.264 62.484,80.264
PULSE_A_G on Bottom Layer "PULSE_A_G_L02_P034" (solid, pour order 34): 69.85,84.582 74.295,84.582 74.295,82.706 69.85,82.706
PULSE_A_G on Bottom Layer "PULSE_A_G_L02_P035" (solid, pour order 35): 85.471,84.582 89.662,84.582 89.662,82.804 85.471,82.804
PULSE_B_G on Bottom Layer "PULSE_B_G_L02_P036" (solid, pour order 36): 74.549,77.851 79.22,77.851 79.22,75.946 74.549,75.946
PULSE_B_G on Bottom Layer "PULSE_B_G_L02_P037" (solid, pour order 37): 89.789,77.724 94.107,77.724 94.107,75.946 89.789,75.946
+12 on Bottom Layer "+12_L02_P038" (solid, pour order 38): 107.687,43.081 107.696,43.073 107.696,37.973 108.585,37.084 123.444,37.084 124.46,38.1 124.333,38.227 124.333,43.942 126.619,43.942 126.619,36.957 124.714,35.052 107.188,35.052 105.537,36.703 105.541,36.707 105.541,55.757 106.68,56.896 115.697,56.896 116.332,56.261 116.332,53.975 116.713,53.594 116.713,51.943 113.665,51.943 113.665,53.467 114.046,53.848 114.046,54.737 113.792,54.991 108.585,54.991 107.696,54.102 107.696,43.053
GND1 on Bottom Layer "GND1_L02_P039" (solid, pour order 39): 116.713,51.181 116.713,49.149 111.125,49.149 110.109,48.133 110.109,40.259 110.744,39.624 121.158,39.624 121.793,40.259 121.793,53.086 122.301,53.594 123.571,53.594 124.206,52.959 124.206,51.816 124.968,51.054 129.286,51.054 135.509,44.831 147.32,44.831 147.828,45.339 149.606,45.339 152.908,42.037 152.908,38.989 153.416,38.481 159.766,38.481 160.242,38.957 160.242,42.037 162.56,42.037 162.56,38.1 160.909,36.449 151.257,36.449 149.733,37.973 149.733,40.894 148.971,41.656 134.366,41.656 127.254,48.768 124.714,48.768 123.789,47.843 123.789,39.207 122.555,37.973 109.22,37.973 108.331,38.862 108.331,53.34 108.585,53.594 109.855,53.594 110.109,53.34 110.109,52.451 111.379,51.181
NetC2_1 on Bottom Layer "NETC2_1_L02_P040" (solid, pour order 40): 110.744,43.561 115.316,43.561 117.348,45.593 117.348,56.642 118.745,58.039 135.763,58.039 139.065,54.737 139.065,50.038 139.7,49.403 145.796,49.403 146.812,48.387 156.591,48.387 157.734,47.244 157.734,43.688 159.258,42.164 159.258,40.003 153.924,40.003 153.924,42.164 155.575,43.815 155.575,45.974 155.321,46.228 145.669,46.228 144.653,47.244 136.398,47.244 136.398,54.356 134.366,56.388 119.634,56.388 118.745,55.499 118.745,44.704 115.062,41.021 110.744,41.021
+5 on Bottom Layer "+5_L02_P041" (solid, pour order 41): 119.534,53.313 119.534,41.683 119.507,41.656 119.507,41.021 120.748,41.021 120.782,40.987 120.816,41.021 121.031,41.021 121.031,54.102 121.412,54.483 126.365,54.483 126.619,54.229 126.619,53.848 126.111,53.848 125.984,53.721 125.984,51.689 129.286,51.689 129.286,53.594 129.032,53.848 128.397,53.848 128.397,54.864 127.381,55.88 120.523,55.88 119.534,54.891
NetD11_2 on Bottom Layer "NETD11_2_L02_P042" (solid, pour order 42): 74.803,70.612 76.581,70.612 76.581,68.899 74.803,68.899
NetD11_2 on Bottom Layer "NETD11_2_L02_P043" (solid, pour order 43): 77.343,70.104 78.867,70.104 78.867,68.58 77.343,68.58
NetD11_2 on Bottom Layer "NETD11_2_L02_P044" (solid, pour order 44): 76.887,68.834 78.867,68.834 78.867,66.548 76.887,66.548
NetD12_2 on Bottom Layer "NETD12_2_L02_P045" (solid, pour order 45): 89.725,70.547 91.44,70.547 91.44,68.834 89.725,68.834
NetD12_2 on Bottom Layer "NETD12_2_L02_P046" (solid, pour order 46): 92.317,70.104 93.853,70.104 93.853,68.58 92.317,68.58
NetD12_2 on Bottom Layer "NETD12_2_L02_P047" (solid, pour order 47): 92.329,68.58 93.853,68.58 93.853,66.294 93.844,66.303 92.329,66.303
NetD5_2 on Bottom Layer "NETD5_2_L02_P048" (solid, pour order 48): 72.517,89.789 74.295,89.789 74.295,91.694 72.517,91.694
NetD5_2 on Bottom Layer "NETD5_2_L02_P049" (solid, pour order 49): 69.977,91.948 71.628,91.948 71.628,90.297 69.977,90.297
NetD5_2 on Bottom Layer "NETD5_2_L02_P050" (solid, pour order 50): 69.977,93.971 71.882,93.971 71.882,91.567 69.977,91.567
NetD6_2 on Bottom Layer "NETD6_2_L02_P051" (solid, pour order 51): 85.155,94.107 86.868,94.107 86.868,92.421 85.155,92.421
NetD6_2 on Bottom Layer "NETD6_2_L02_P052" (solid, pour order 52): 85.217,92.421 86.995,92.421 86.995,90.424 85.217,90.424
NetD6_2 on Bottom Layer "NETD6_2_L02_P053" (solid, pour order 53): 87.757,89.916 89.408,89.916 89.662,90.17 89.662,91.948 87.757,91.948
VBATT on Bottom Layer "VBATT_L02_P058" (solid, pour order 58): 98.298,65.405 100.33,65.405 100.33,66.421 108.966,75.057 113.157,75.057 113.157,75.692 107.569,75.692 99.346,67.469 98.298,67.469
VBATT on Bottom Layer "VBATT_L02_P059" (solid, pour order 59): 69.342,39.116 69.342,37.084 96.266,37.084 100.457,41.275 100.457,51.816 98.425,51.816 98.425,41.91 95.631,39.116 81.026,39.116
I_SENSE on Bottom Layer "I_SENSE_L02_P061" (solid, pour order 61): 166.243,45.72 166.37,45.72 188.976,45.593 189.992,46.609 189.992,54.102 196.215,54.102 196.215,41.529 191.008,36.322 166.243,36.322
GND1 on Bottom Layer "GND1_L02_P062" (solid, pour order 62): 160.242,47.503 161.507,48.768 167.767,48.768 168.91,49.911 168.91,55.372 170.815,55.372 170.815,49.715 170.795,49.695 170.815,49.675 170.815,49.276 168.529,46.99 163.254,46.99 162.56,46.296 162.56,39.751 160.242,39.751
VBATT on Top Layer "VBATT_L01_P060" (solid, pour order 60): 98.552,67.437 100.33,67.437 100.33,49.911 98.552,49.911

## Silkscreen, mask and mechanical layers (free items; w line width, h text height)
Board Shape:
  the board outline again, w0.5

## Text inside footprints (layer, text, board x,y; h text height)
C1: Top Overlay "+" at 103.585,50.114 h1.2
C2: Top Overlay "+" at 138.466,53.461 h1.02 r90; Top Assembly "+" at 138.466,53.461 h1.02 r90
C4: Top Overlay "+" at 117.261,50.114 h1.2